# Altium PCB PLC - Gas water - sensor detector-PCB-v2_2021-12-08.pcbdoc
Units mm, origin at the board's own origin, x right, y up, seen from the top; angles counter-clockwise.
Board outline 184.66 x 134.62 mm, 2 copper layers (Top Layer, Bottom Layer); 16 components, 20 nets, 81 pads, 0 vias.
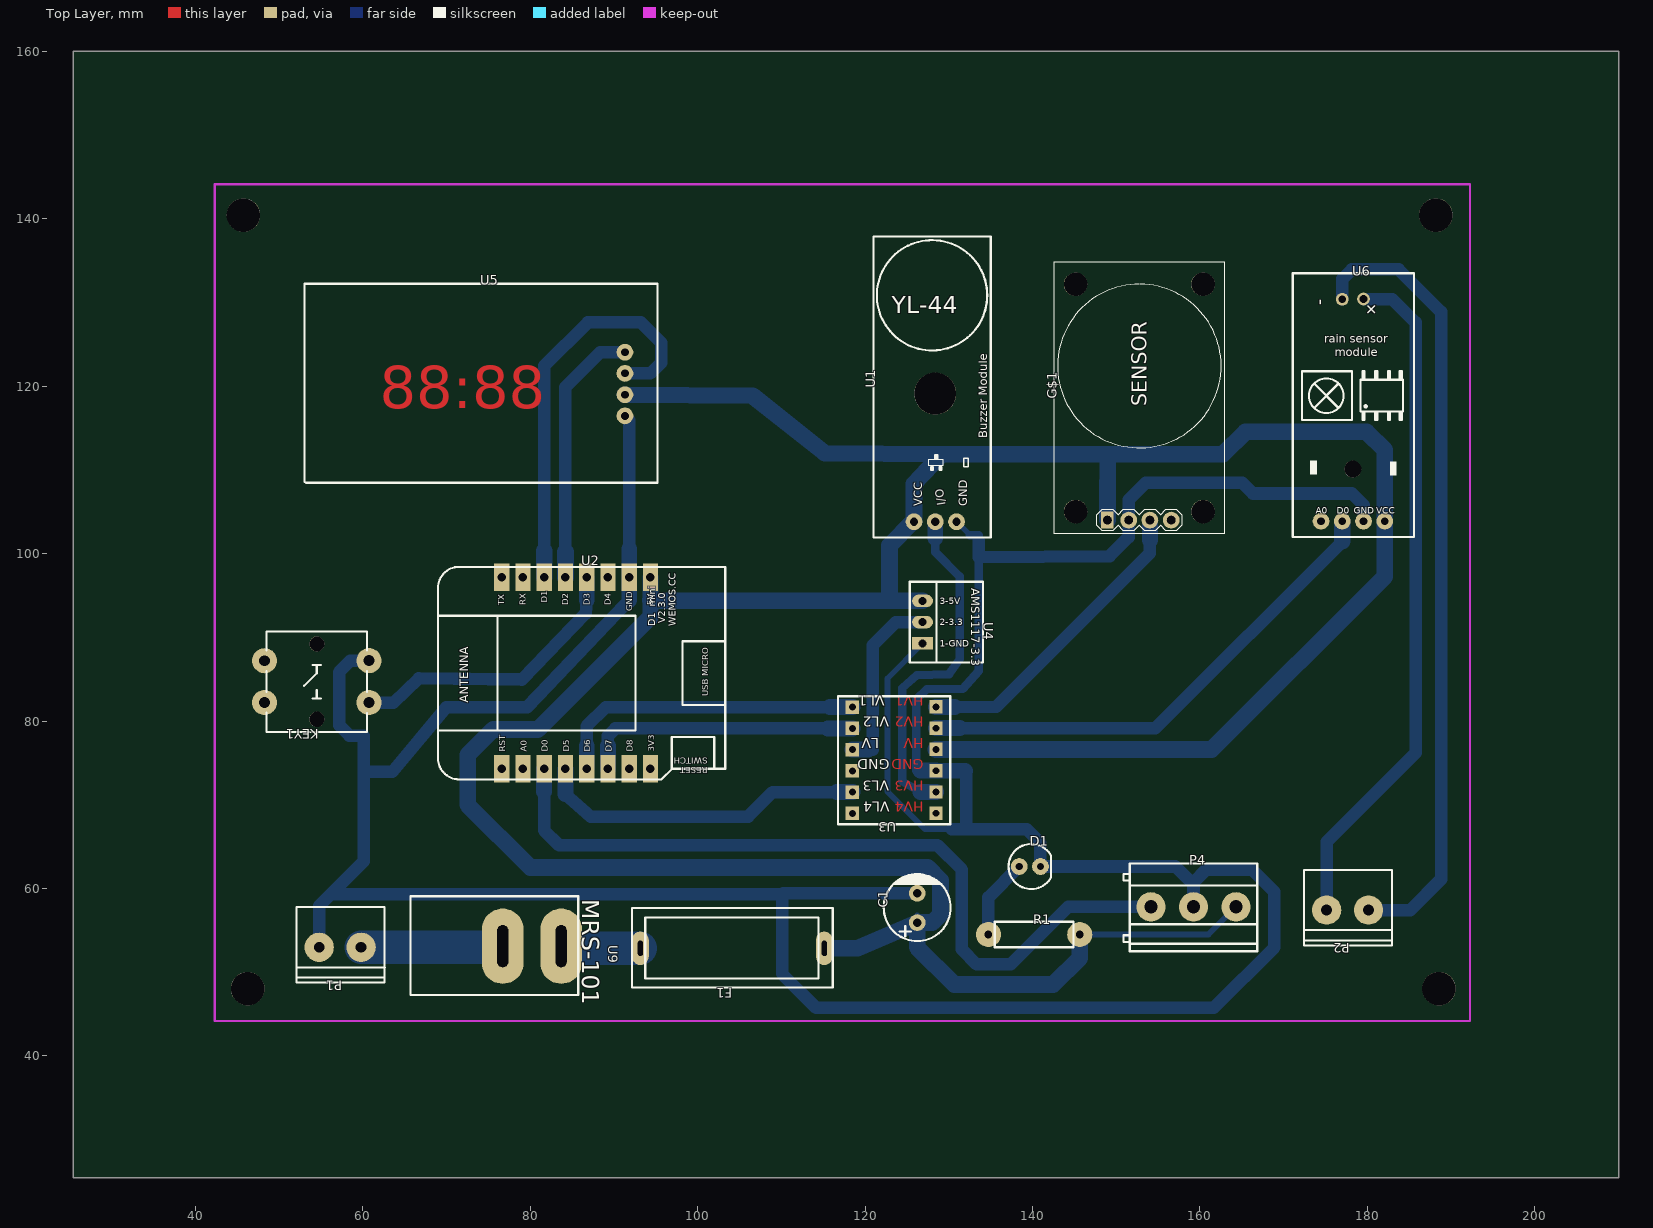
[diagram p0: Top Layer view]
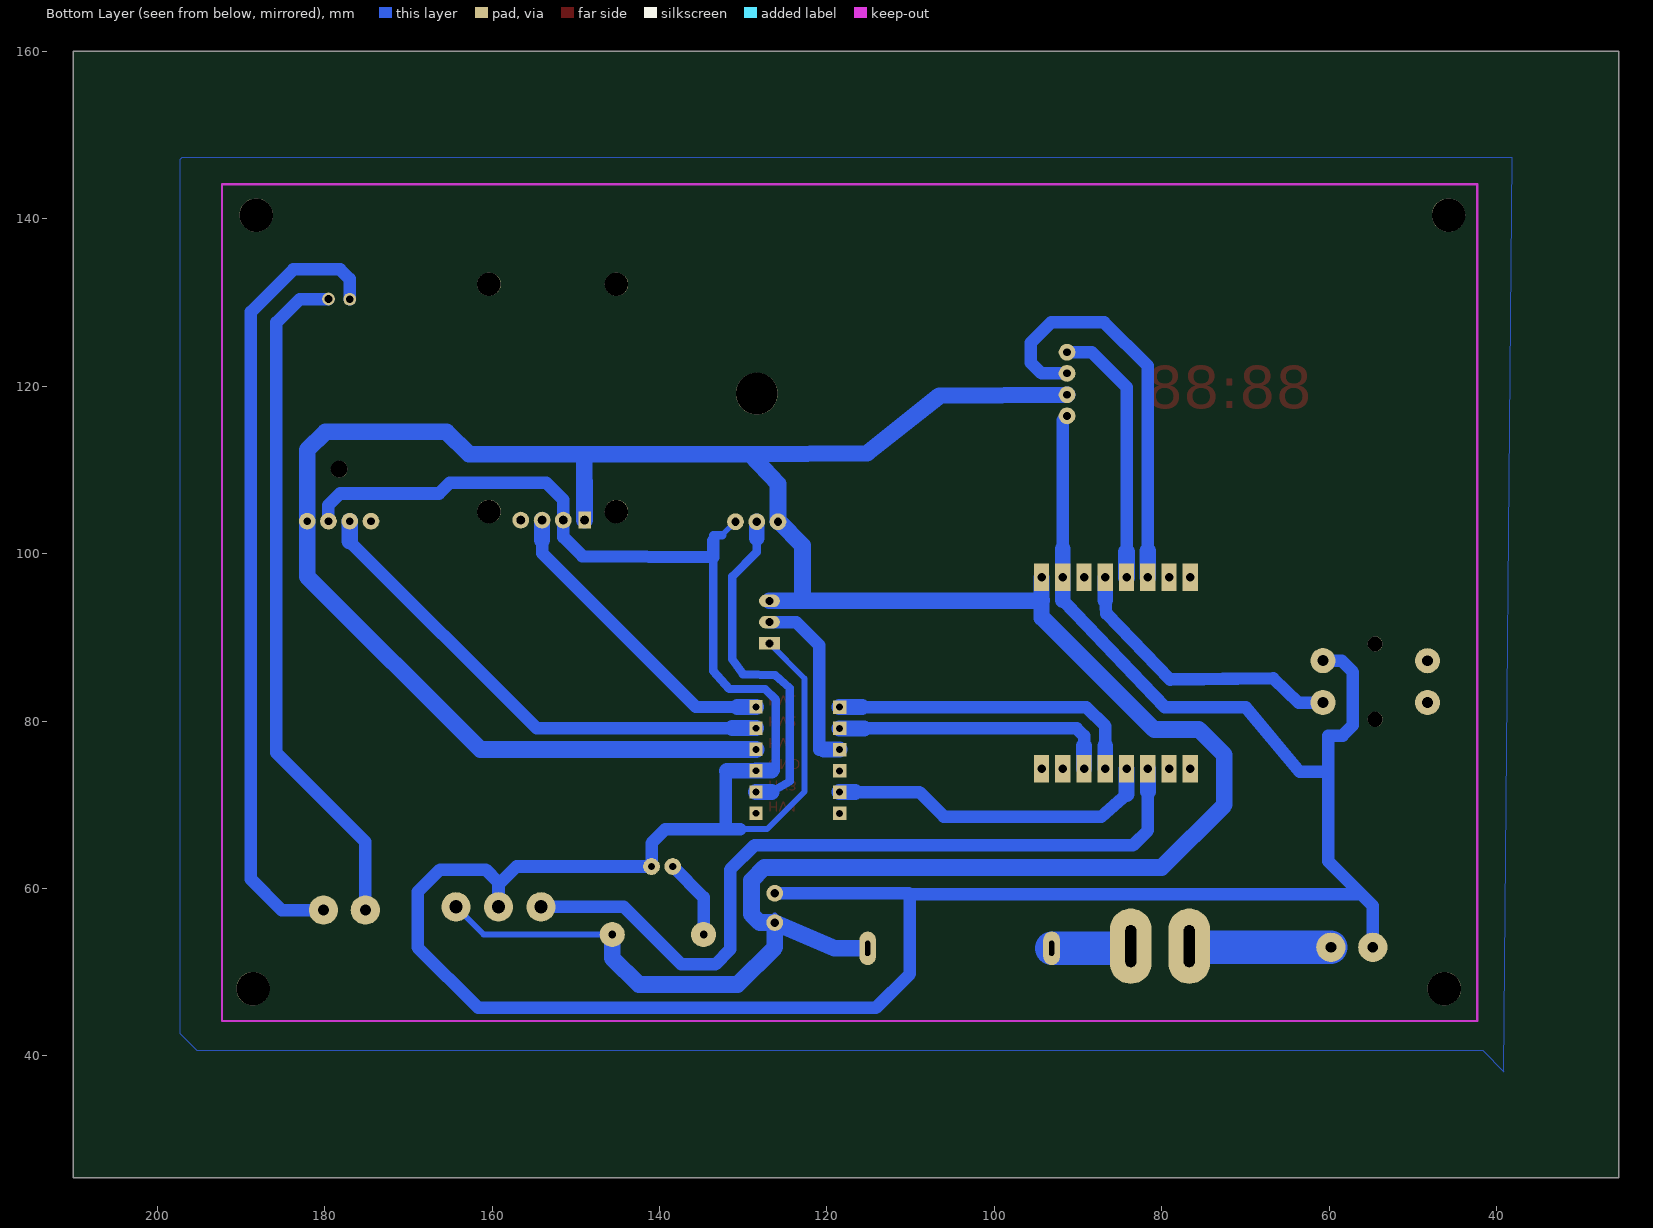
[diagram p1: Bottom Layer view, seen from below]

## Layer stack, top to bottom
Top Layer: signal copper (thickness not stored)
Dielectric: dielectric 0.32, FR-4, Dk 4.8
Bottom Layer: signal copper (thickness not stored)

## Board outline
210.058,25.4 25.4,25.4 25.4,160.02 210.058,160.02

## Components (designator, comment, footprint, x,y, rotation, side; value= is the part's Value field where it differs from the comment)
C1 "470uF/16v" CAP-TH_BD8.0-P3.50-D1.0-FD 126.238,57.658 r90 top
D1 "LED" "LED - 5MM" 139.7,62.611 r0 top
F1 "FUSE" 5X20-BLX-A 104.14,52.832 r180 top
G$1 "GAS-SENSOR-MQ2" GAS-SENSOR-MQ2 148.971,104.013 r90 top
KEY1 "B3F-4055" KEY-TH_4P-L12.0-W12.0-P5.00-LS13.4-EH 54.483,84.709 r180 top
P1 "CONN-P5.00" CONN-TH_2P-P5.00 57.277,52.959 r180 top
P2 "CONN-P5.00" CONN-TH_2P-P5.00 177.673,57.404 r180 top
P4 "CONN-P5.00" CONN-TH_3P-P5.08 159.258,57.785 r0 top
R1 "200" R-0.5W 140.081,54.483 r0 top
U1 "YL-44" "YL-44 BUZZER MODULE - PCB" 128.397,111.252 r90 top
U2 "WEMOS_D1_MINI" WEMOS 85.471,85.725 r0 top
U3 "logic level converter" 4BITS_LOGIC_LEVEL_CONVERTER_BIDIRECTIONAL_5V_33V-10MM 118.491,68.961 r180 top
U4 "AMS1117-3.3" "AMS1117-3.3 FIXED" 126.873,91.821 r270 top
U5 "TM1637" TM1637-PCB 48.133,141.859 r0 top
U6 "rain sensor arudino module" "RAIN SENSOR ARUDINO MODULE PCB" 172.085,105.156 r0 top
U9 "MRS-101" "MRS-101 SWITCH PCB" 83.693,53.086 r270 top

## Footprints (in the part's own frame and the unit in brackets; to place one, negate y for a bottom-side part, rotate by r counter-clockwise, add the part's x,y. Pads: shape width x height; smd on the part's side, far side on the other; paste and mask are expansions set on the pad)
4BITS_LOGIC_LEVEL_CONVERTER_BIDIRECTIONAL_5V_33V-10MM [mil]
  rect 63x63 hole 32: 1(0,-500) 2(0,-400) 3(0,-300) 4(0,-200) 5(0,-100) 6(0,0) 7(-393.7,-0.79) 8(-393.7,-100.79) 9(-393.7,-200.79) 10(-393.7,-300.79) 11(-393.7,-400.79) 12(-393.7,-500.79)
  silkscreen extent -461,-551 67,51
5X20-BLX-A [mm]
  oval 2x4 hole 0.6 slot 1.8 at 90 deg: 1(-11.001,0) 2(10.983,-0.005)
  silkscreen extent -12,-4.8 12,4.7
"AMS1117-3.3 FIXED" [mm]
  rect 1.5x2.5 hole 0.94: 1(2.54,0)
  oval 1.5x2.5 hole 0.94: 2(0,0) 3(-2.54,0)
  silkscreen extent -4.83,-1.52 4.83,7.24
CAP-TH_BD8.0-P3.50-D1.0-FD [mm]
  round 2 hole 1: 1(-1.75,0) 2(1.75,0)
  silkscreen extent -3.96,-4 4.04,4
CONN-TH_2P-P5.00 [mm]
  round 3.5 hole 1.3: 1(-2.504,0) 2(2.504,0)
  silkscreen extent -5.32,-4.8 5.21,4.23
CONN-TH_3P-P5.08 [mm]
  round 3.5 hole 1.6: 1(-5.08,0) 2(0,0) 3(5.08,0)
  silkscreen extent -8.38,-5.3 7.62,5.2
GAS-SENSOR-MQ2 [mm]
  rect 2x1.508 hole 1: 1(0,0)
  round 2 hole 1: 2(0,-2.54) 3(0,-5.08) 4(0,-7.62)
  round 2.8 hole 2.8 unplated: ""(1.016,3.81) ""(1.016,-11.43) ""(28.194,-11.43) ""(28.194,3.81)
  silkscreen extent -1.65,-13.97 30.86,6.35
KEY-TH_4P-L12.0-W12.0-P5.00-LS13.4-EH [mm]
  round 3 hole 1.3: 1(-6.253,-2.499) 2(6.246,-2.497) 3(6.253,2.497) 4(-6.253,2.499)
  round 1.8 hole 1.8 unplated: ""(0,4.5) ""(0,-4.5)
  silkscreen extent -5.99,-6 6.01,6
"LED - 5MM" [mm]
  round 2 hole 0.889: 1(-1.27,0) 2(1.27,0)
  silkscreen extent -2.54,-2.7 2.54,2.7
"MRS-101 SWITCH PCB" [mm]
  oval 9x5 hole 1.3 slot 5 at 0 deg: 1(0,0) 2(0,-6.985)
  silkscreen extent -5.97,-18.02 5.83,2.03
R-0.5W [mm]
  round 3 hole 0.914: 1(-5.334,0) 2(5.588,0)
  silkscreen extent -4.57,-1.52 4.83,1.52
"RAIN SENSOR ARUDINO MODULE PCB" [mil]
  round 78.74 hole 36: 1(395,-50) 2(295,-50) 3(195,-50) 4(95,-50)
  round 60 hole 36: 5(195,993.62) 6(295,995)
  round 78.74 hole 78.74 unplated: ""(245.01,195)
  silkscreen extent -38,-124 533,1116
TM1637-PCB [mm]
  round 2 hole 0.914: 1(43.18,-17.78) 2(43.18,-20.32) 3(43.18,-22.86) 4(43.18,-25.4)
  silkscreen extent 4.9,-33.39 47.08,-9.6
WEMOS [mil]
  rect 72x129.6 hole 40: 3V3(350,-450) 5V(350,450) A0(-250,-450) D0(-150,-450) D1(-150,450) D2(-50,450) D3(50,450) D4(150,450) D5(-50,-450) D6(50,-450) D7(150,-450) D8(250,-450) GND(250,450) RST(-350,-450) RX(-250,450) TX(-350,450)
  silkscreen extent -650,-500 702,500
"YL-44 BUZZER MODULE - PCB" [mm]
  round 2 hole 1: GND(-7.429,-2.54) I/O(-7.429,0) VCC(-7.429,2.54)
  round 5 hole 5 unplated: ""(7.874,0)
  silkscreen extent -9.33,-6.63 26.67,7.37

## Free pads (board coordinates)
  round 4 hole 4 unplated: ""(45.72,140.462) ""(46.228,48.006) ""(188.214,140.462) ""(188.595,48.006)

## Nets (pads, with @x,y where several pads share a name; then routed paths per layer and width w, separated by ;. In a path a pad name is that pad's centre, name@x,y a point inside that pad or via, vN(x,y) a via of type N, cw(c..) or ccw(c..) an arc to the next point about the centre after c; other vN are vias at no path point)
3V3: U3.3 U4.2 | length 22
  Bottom Layer w1.5: 120.343,76.581 120.904,76.581 120.904,89.027 123.698,91.821 U4.2
  Bottom Layer w1.9: U3.3 120.343,76.581
5V: C1.1 F1.1 G$1.1 P4.3 R1.2 U1.VCC U2.5V U3.10 U4.3 U5.3 U6.1 | length 410.4
  Bottom Layer w0.7: 94.361,94.458 U2.5V ; U1.VCC@125.6,104.079 U1.VCC ; C1.1 C1.1@126.238,56.782 ; R1.2 161.036,54.483 P4.3
  Bottom Layer w1.9: 94.361,92.329 U2.5V
  Bottom Layer w2: U5.3 106.553,118.872 115.189,112.014 129.159,111.887 ; 94.234,92.329 80.899,78.994 75.565,78.994 72.517,75.946 72.517,69.977 80.01,62.484 127.508,62.484 129.032,60.96 129.032,56.896 128.044,55.908 C1.1 ; 94.361,94.458 94.361,94.361 U4.3 ; F1.1 119.126,52.832 C1.1 ; 122.929,94.361 122.936,100.965 U1.VCC@125.73,103.823 ; U1.VCC 125.857,108.331 129.159,111.887 ; U3.10 161.437,76.601 182.118,97.282 U6.1 182.118,112.395 179.959,114.554 165.448,114.554 162.781,111.887 149.022,111.887 148.971,105.819 G$1.1 ; R1.2 145.669,51.689 142.494,48.514 130.683,48.514 126.238,52.959 C1.1 ; 155.611,111.887 152.037,111.887 129.159,111.887
BUZ: U1.I/O U3.8 | length 41.6
  Bottom Layer w1: 126.639,71.521 124.46,72.771 124.46,83.947 126.192,85.471 130.048,85.598 131.318,87.376 131.318,97.282 128.397,100.188 128.397,101.854
  Bottom Layer w1.9: 126.639,71.521 U3.8 ; 128.397,101.854 U1.I/O
GAZ: G$1.3 U3.12 | length 37.1
  Bottom Layer w1.5: 130.683,81.661 135.656,81.681 154.051,100.076 154.051,101.6
  Bottom Layer w1.9: U3.12 130.683,81.681 ; 154.051,101.6 G$1.3
GND: C1.2 D1.2 G$1.2 KEY1.1 P1.2 P4.2 U1.GND U2.GND U3.9 U4.1 U5.4 U6.2 | length 445.7
  Bottom Layer w0.7: U4.1 122.682,85.09 122.682,71.557 127.165,67.074 130.343,67.074 ; U1.GND 132.537,102.222 132.537,102.207
  Bottom Layer w1: 126.639,74.061 126.111,74.061 126.111,82.54 127.391,83.82 131.699,83.82 133.604,85.979 133.604,102.207 132.537,102.207
  Bottom Layer w1.5: P1.2 54.773,57.912 60.073,63.213 60.073,78.257 58.395,78.257 57.15,79.502 57.15,85.852 58.506,87.208 KEY1.1 ; 56.388,59.309 60.073,59.309 106.55,59.309 110.109,59.304 ; 60.073,73.913 63.5,73.914 69.977,81.661 79.629,81.661 90.297,92.837 91.821,94.458 ; U5.4 91.821,115.951 91.821,100.584 ; 108.052,59.309 110.109,59.304 ; 110.109,56.012 110.109,59.304 ; C1.2 110.213,59.408 110.109,59.304 ; 130.343,67.074 139.301,67.074 140.97,65.405 D1.2 157.099,62.611 159.258,60.452 P4.2 159.258,60.706 160.782,62.23 166.243,62.23 168.91,59.563 168.91,52.959 161.671,45.72 114.173,45.72 110.109,49.784 110.109,59.304 ; 132.08,67.056 132.08,74.044 ; 133.604,101.539 133.604,99.561 149.225,99.695 151.511,101.981 G$1.2 151.511,106.426 153.543,108.458 165.1,108.458 166.37,107.188 178.181,107.188 179.578,105.791 U6.2
  Bottom Layer w1.9: 91.821,94.458 U2.GND 91.821,100.584 ; 126.639,74.061 U3.9 131.953,74.041
GPIO0: KEY1.4 U2.D3 | length 34.7
  Bottom Layer w1.5: KEY1.4 63.627,82.169 66.675,85.09 78.994,84.963 86.614,92.837 86.741,94.458
  Bottom Layer w1.9: 86.741,94.458 U2.D3
GPIO4: U2.D2 U5.1 | length 31.6
  Bottom Layer w1.5: 84.201,100.203 84.201,119.888 88.392,124.079 U5.1
  Bottom Layer w2: U2.D2 84.201,100.203
GPIO5: U2.D1 U5.2 | length 49.7
  Bottom Layer w1.5: 81.661,100.33 81.661,122.428 86.868,127.635 93.218,127.635 95.631,125.222 95.631,122.809 94.361,121.539 U5.2
  Bottom Layer w2: U2.D1 81.661,100.33
GPIO12: U2.D6 U3.1 | length 37.8
  Bottom Layer w1.5: 86.741,76.993 86.741,79.375 89.027,81.661 115.824,81.661
  Bottom Layer w1.9: U2.D6 86.741,76.993 ; 115.824,81.661 U3.1
GPIO13: U2.D7 U3.2 | length 33.5
  Bottom Layer w1.5: 89.281,76.993 89.281,78.232 90.17,79.121 115.57,79.121
  Bottom Layer w1.9: U2.D7 89.281,76.993 ; 115.57,79.121 U3.2
GPIO14: U2.D5 U3.5 | length 39.5
  Bottom Layer w1.5: 84.201,71.247 87.249,68.58 106.045,68.58 108.966,71.501 116.639,71.501
  Bottom Layer w1.9: 84.201,71.247 U2.D5 ; 116.639,71.501 U3.5
GPIO16: P4.1 U2.D0 | length 94.9
  Bottom Layer w1.5: 81.661,71.598 81.661,66.929 83.439,65.151 128.651,65.151 131.572,62.23 131.572,52.705 133.35,50.927 137.414,50.927 144.272,57.785 P4.1
  Bottom Layer w1.9: 81.661,71.598 U2.D0
P1_2: P1.1 U9.2 | length 16.9
  Bottom Layer w4: P1.1 60.035,52.959 U9.2@76.708,52.959
R1_1: D1.1 R1.1 | length 9.7
  Bottom Layer w1.5: R1.1 134.747,58.928 D1.1
RAIN1+: P2.2 U6.6 | length 82
  Bottom Layer w1.5: P2.2 175.168,65.568 185.801,76.2 185.801,127.635 183.007,130.429 U6.6
RAIN1-: P2.1 U6.5 | length 94.9
  Bottom Layer w1.5: U6.5 177.038,132.842 178.181,133.985 183.769,133.985 188.849,128.905 188.849,61.087 185.166,57.404 P2.1
S$24: 
S$43: 
U9_1: F1.2 U9.1 | length 9.5
  Bottom Layer w4: U9.1@83.693,52.832 93.152,52.832 F1.2
WAT: U3.11 U6.3 | length 60.7
  Bottom Layer w1.5: 131.318,79.121 154.706,79.141 177.038,101.473 177.038,101.981
  Bottom Layer w1.9: U3.11 131.318,79.141
  Bottom Layer w2: 177.038,101.473 U6.3
pads on no net: G$1. G$1.4 KEY1. KEY1.2 KEY1.3 U1. U2.3V3 U2.A0 U2.D4 U2.D8 U2.RST U2.RX U2.TX U3.4 U3.6 U3.7 U6. U6.4

## Polygon pours and split planes (outlines as drawn)
GND on Bottom Layer (solid): 38.1,147.32 197.104,147.32 197.358,147.066 197.358,42.672 195.326,40.64 41.656,40.64 39.116,38.1

## Text inside footprints (layer, text, board x,y; h text height)
G$1: Top Overlay "SENSOR" at 153.67,117.627 h1.78 r90
U1: Top Overlay "Buzzer Module" at 134.612,113.792 h1 r90; Top Overlay "VCC" at 126.865,105.664 h1 r90; Top Overlay "I/O" at 129.653,105.869 h1 r99; Top Overlay "GND" at 132.199,105.664 h1 r90
U2: Top Overlay "D1  mini /  V2.3.0 / WEMOS.CC" at 97.371,91.313 h0.81 r90; Top Overlay "RST" at 77.008,76.327 h0.76 r90; Top Overlay "A0" at 79.548,76.327 h0.76 r90; Top Overlay "D0" at 82.088,76.327 h0.76 r90; Top Overlay "D5" at 84.628,76.327 h0.76 r90; Top Overlay "D6" at 87.168,76.327 h0.76 r90; Top Overlay "D7" at 89.708,76.327 h0.76 r90; Top Overlay "D8" at 92.248,76.327 h0.76 r90; Top Overlay "3V3" at 94.788,76.327 h0.76 r90; Top Overlay "5V" at 94.696,93.853 h0.76 r90; Top Overlay "GND" at 92.156,93.091 h0.76 r90; Top Overlay "D4" at 89.616,93.853 h0.76 r90; Top Overlay "D3" at 87.076,93.853 h0.76 r90; Top Overlay "D2" at 84.536,93.853 h0.76 r90; Top Overlay "D1" at 81.996,94.107 h0.76 r90; Top Overlay "RX" at 79.456,93.853 h0.76 r90; Top Overlay "TX" at 76.916,93.853 h0.76 r90; Top Overlay "ANTENNA" at 72.563,82.169 h1.02 r90; Top Overlay "USB MICRO" at 101.254,82.931 h0.76 r90; Top Overlay "RESET / SWITCH" at 101.219,75.601 h0.76 r180
U3: Top Overlay "VL1" at 122.374,83.043 h1.2 r180; Top Overlay "VL2" at 122.905,80.503 h1.2 r180; Top Overlay "LV" at 121.688,77.963 h1.2 r180; Top Overlay "GND" at 122.963,75.423 h1.2 r180; Top Overlay "VL3" at 122.905,72.883 h1.2 r180; Top Overlay "VL4" at 122.963,70.343 h1.2 r180; Top Layer "HV4" at 127.027,70.343 h1.2 r180; Top Layer "HV3" at 127.027,72.883 h1.2 r180; Top Layer "GND" at 127.027,75.423 h1.2 r180; Top Layer "HV" at 127.027,77.963 h1.2 r180; Top Layer "HV2" at 127.027,80.503 h1.2 r180; Top Layer "HV1" at 127.027,83.043 h1.2 r180
U4: Top Overlay "1-GND" at 128.905,88.881 h0.8; Top Overlay "2-3.3" at 128.905,91.421 h0.8; Top Overlay "3-5V" at 128.905,93.961 h0.8
U5: Document "GND" at 83.124,115.61 h1.5; Document "VCC" at 83.124,118.211 h1.5; Document "DIO" at 83.124,120.693 h1.5; Document "CLK" at 83.124,123.179 h1.5; Top Layer "88:88" at 62.022,117.358 h5
U6: Top Overlay "A0" at 173.863,104.756 h0.8; Top Overlay "D0" at 176.403,104.756 h0.8; Top Overlay "GND" at 178.435,104.756 h0.8; Top Overlay "VCC" at 181.102,104.756 h0.8; Top Overlay "rain sensor" at 174.879,125.23 h1; Top Overlay "module" at 176.149,123.579 h1; Top Overlay "+" at 180.699,130.197 h1.5 r225; Top Overlay "-" at 174.994,129.667 h1.5 r90